# EAGLE board brain_v01 (EAGLE 9.5.2)
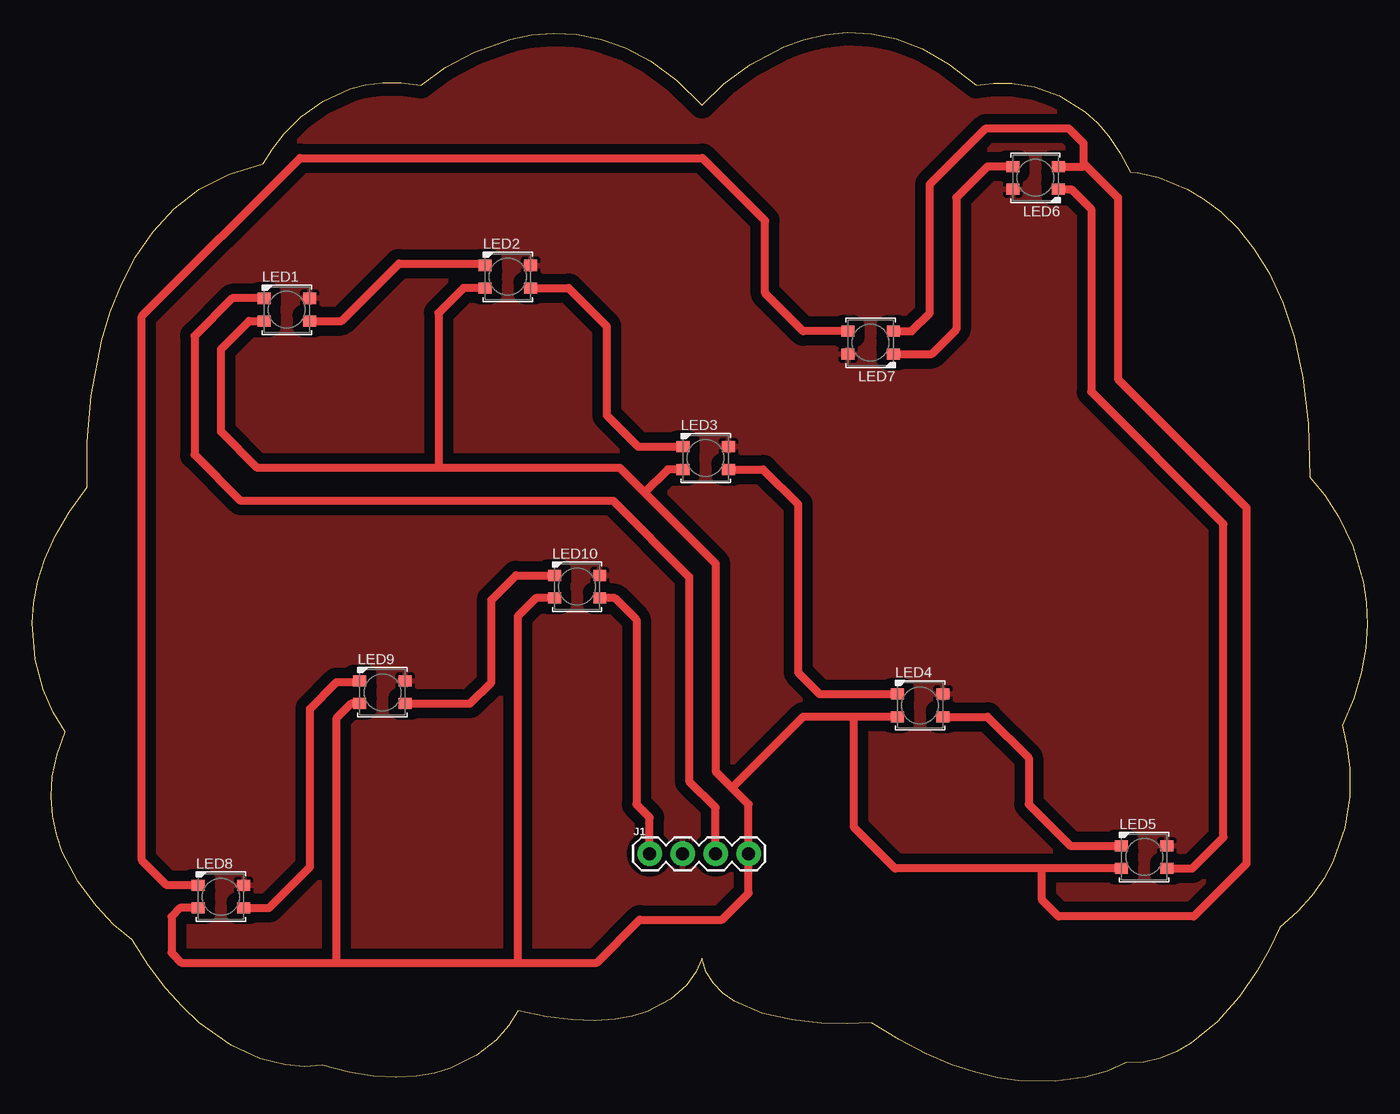
[diagram p0: board, top side]

Size 102.8 x 80.8 mm. Coordinates in mm from the lower left corner, seen from the top.
Outline: 51.56,9.5 51.1,8.43 50.36,7.4 49.15,6.31 47.35,5.36 46.2,5.01 44.86,4.77 43.33,4.67 41.58,4.73 39.6,4.98 37.39,5.45 36.67,4.29 35.69,3.17 34.22,2.01 32.2,1 30.97,0.64 29.58,0.39 28.02,0.31 26.29,0.4 24.39,0.71 22.3,1.25 20.97,1.14 19.47,1.27 17.55,1.75 15.3,2.78 12.84,4.53 11.56,5.73 10.26,7.18 8.96,8.89 7.66,10.9 6.27,12.07 4.93,13.47 3.52,15.35 2.31,17.68 1.86,19 1.56,20.42 1.44,21.92 1.54,23.51 1.89,25.18 2.52,26.93 1.61,28.43 0.85,30.18 0.23,32.5 0,35.29 0.11,36.85 0.42,38.5 0.96,40.22 1.75,42.02 2.83,43.87 4.24,45.78 4.23,49.23 4.54,52.84 5.35,57.06 6,59.26 6.86,61.43 7.95,63.53 9.29,65.48 10.92,67.23 12.86,68.72 15.14,69.89 17.78,70.68 18.49,71.85 19.4,73.01 20.69,74.3 22.38,75.51 24.47,76.46 25.68,76.77 26.98,76.93 28.4,76.94 29.92,76.75 31.83,78.12 34.02,79.29 36.83,80.29 38.43,80.61 40.13,80.75 41.92,80.66 43.78,80.29 45.69,79.61 47.64,78.57 49.6,77.11 51.56,75.19 53.27,76.84 55.26,78.31 57.88,79.71 59.39,80.25 61.03,80.63 62.78,80.8 64.62,80.71 66.55,80.3 68.55,79.54 70.61,78.37 72.72,76.75 74.02,76.91 75.43,76.89 77.17,76.61 79.09,75.94 81.06,74.71 82.01,73.85 82.92,72.8 83.77,71.54 84.55,70.06 85.15,70 86.73,69.64 88.97,68.73 90.23,67.98 91.53,66.99 92.83,65.73 94.08,64.16 95.25,62.26 96.3,59.99 97.18,57.32 97.85,54.2 98.27,50.62 98.4,46.54 99.55,45.15 100.62,43.48 101.69,41.24 102.49,38.46 102.72,36.88 102.8,35.19 102.68,33.4 102.35,31.5 101.76,29.5 100.89,27.41 101.25,25.85 101.45,24.13 101.45,21.96 101.08,19.51 100.17,16.91 99.46,15.6 98.55,14.31 97.43,13.05 96.06,11.85 95.27,10.18 94.29,8.47 92.95,6.52 91.26,4.58 89.24,2.92 88.1,2.27 86.89,1.78 85.6,1.49 84.23,1.42 82.81,0.79 81.11,0.31 78.81,0 75.96,0.06 74.34,0.29 72.61,0.7 70.77,1.3 68.82,2.12 66.77,3.19 64.62,4.53 62.74,4.45 60.78,4.49 58.51,4.73 56.18,5.25 54.07,6.16 53.18,6.78 52.44,7.54 51.89,8.44 51.56,9.5
Copper layers (1*16): Top 0.035mm / dielectric 0.15mm / Bottom 0.035mm
Design rules "default": minimum track width 6mil, minimum drill 0.35mm, track to track 6mil, track to pad 6mil, pad to pad 6mil, via to via 6mil, smd to smd 6mil, copper to edge 40mil, drill to drill 6mil, minimum pad ring 10mil, minimum via ring 8mil, stop-mask expansion 4mil, vias tented up to drill 0mil, thermal gap 10mil

## Footprints (pad centres in the part's own frame; a part is rotated, then mirrored left to right if it is on the bottom)
1X04 = drill 1.016 pad 1.88: 1 0,0; 2 2.54,0; 3 5.08,0; 4 7.62,0
LED3535 = smd 1 x 0.85: 1 -1.75,0.875; 2 -1.75,-0.875; 3 1.75,-0.875; 4 1.75,0.875

## Placement (x,y rotation side)
FRAME1  FRAME-LETTER  [CREATIVE_COMMONS]  -80.23,1.02 0 top  (outside the outline)
J1  [1X04]  47.54,17.53 0 top
LED1  WS2812B3535  [LED3535]  19.6,59.44 0 top
LED2  WS2812B3535  [LED3535]  36.61,61.98 0 top
LED3  WS2812B3535  [LED3535]  51.85,48.01 0 top
LED4  WS2812B3535  [LED3535]  68.36,28.96 0 top
LED5  WS2812B3535  [LED3535]  85.64,17.28 0 top
LED6  WS2812B3535  [LED3535]  77.25,69.6 180 top
LED7  WS2812B3535  [LED3535]  64.55,56.9 180 top
LED8  WS2812B3535  [LED3535]  14.52,14.23 0 top
LED9  WS2812B3535  [LED3535]  26.96,29.98 0 top
LED10  WS2812B3535  [LED3535]  41.95,38.11 0 top

## Library data of the parts
FRAME1 = SparkFun-Aesthetics
J1 = SparkFun-Connectors; PROD_ID: CONN-09696
LED1-LED10 = adafruit

## Nets
5V: J1.4 LED1.2 LED2.2 LED3.2 LED4.2 LED5.2 LED6.2 LED7.2 LED8.2 LED9.2 LED10.2
DI: J1.3 LED1.1
DO: J1.1 LED10.3
GND: J1.2 LED1.4 LED2.4 LED3.4 LED4.4 LED5.4 LED6.4 LED7.4 LED8.4 LED9.4 LED10.4
N$1: LED1.3 LED2.1
N$2: LED2.3 LED3.1
N$3: LED3.3 LED4.1
N$4: LED4.3 LED5.1
N$5: LED6.3 LED7.1
N$6: LED7.3 LED8.1
N$7: LED8.3 LED9.1
N$8: LED9.3 LED10.1
N$9: LED5.3 LED6.1

## Tracks (layer width: path | path; a pad name or v marks a point on that pad's centre or on a via)
5V
  Top 0.61: LED8.2 11.36,13.36 10.71,12.71 10.71,9.91 11.47,9.15 23.41,9.15 | 23.41,9.15 37.38,9.15 | 37.38,9.15 43.47,9.15 46.77,12.45 53.12,12.45 55.16,14.49 J1.4 55.16,21.34 53.89,22.61 | LED9.2 24.56,29.1 23.41,27.95 23.41,9.15 | LED10.2 38.79,37.23 37.38,35.82 37.38,9.15 | 53.89,22.61 52.62,23.88 52.62,39.89 47.16,45.35 | 31.28,47.25 45.25,47.25 47.16,45.35 | 31.28,47.25 17.31,47.25 14.52,50.05 14.52,56.4 16.69,58.57 LED1.2 | LED2.2 33.2,61.11 31.28,59.19 31.28,47.25 | LED3.2 48.95,47.14 47.16,45.35 | LED4.2 63.28,28.09 | 63.28,28.09 59.36,28.09 53.89,22.61 | LED5.2 77.76,16.4 | 77.76,16.4 66.45,16.4 63.28,19.57 63.28,28.09 | LED6.2 80.95,70.48 80.95,70.73 | 77.76,16.4 77.76,13.98 79.03,12.71 89.45,12.71 93.51,16.77 93.51,44.2 83.6,54.11 83.6,68.08 80.95,70.73 | LED7.2 67.72,57.78 69.13,59.19 69.13,69.1 73.44,73.41 79.79,73.41 80.95,72.26 80.95,70.73
DI
  Top 0.61: LED1.1 15.39,60.32 12.48,57.41 12.48,48.27 16.04,44.71 44.74,44.71 50.58,38.87 50.58,23.12 52.62,21.09 J1.3
DO
  Top 0.61: LED10.3 44.86,37.23 46.52,35.57 46.52,21.34 47.54,20.33 J1.1
GND
  pour Top (isolate 0.813): 0.04,-0.25 0.04,81.54 103.42,81.54 103.42,-0.25
N$1
  Top 0.61: LED1.3 23.8,58.57 28.23,63 34.72,63 LED2.1
N$2
  Top 0.61: LED2.3 41.3,61.11 44.23,58.17 44.23,51.32 46.66,48.89 LED3.1
N$3
  Top 0.61: LED3.3 56.29,47.14 58.97,44.46 58.97,31.5 60.63,29.84 LED4.1
N$4
  Top 0.61: LED4.3 73.56,28.09 76.75,24.9 76.75,21.34 79.94,18.15 LED5.1
N$5
  Top 0.61: LED6.3 73.56,70.48 71.16,68.08 71.16,57.92 69.27,56.03 LED7.1
N$6
  Top 0.61: LED7.3 59.36,57.78 56.43,60.71 56.43,66.3 51.6,71.13 20.61,71.13 8.42,58.94 8.42,17.03 10.34,15.11 LED8.1
N$7
  Top 0.61: LED8.3 18.21,13.36 21.37,16.52 21.37,28.71 23.41,30.74 25.1,30.74 LED9.1
N$8
  Top 0.61: LED9.3 33.71,29.1 35.34,30.74 35.34,37.09 37.24,38.98 LED10.1
N$9
  Top 0.61: LED5.3 89.33,16.4 91.73,18.8 91.73,42.93 81.54,53.12 81.54,67.2 80.02,68.73 LED6.1